# Altium PCB Oled.PcbDoc
Units mm, origin at the board's own origin, x right, y up, seen from the top; angles counter-clockwise.
Board outline 90 x 40 mm, 2 copper layers (Top Layer, Bottom Layer); 55 components, 35 nets, 161 pads, 42 vias.
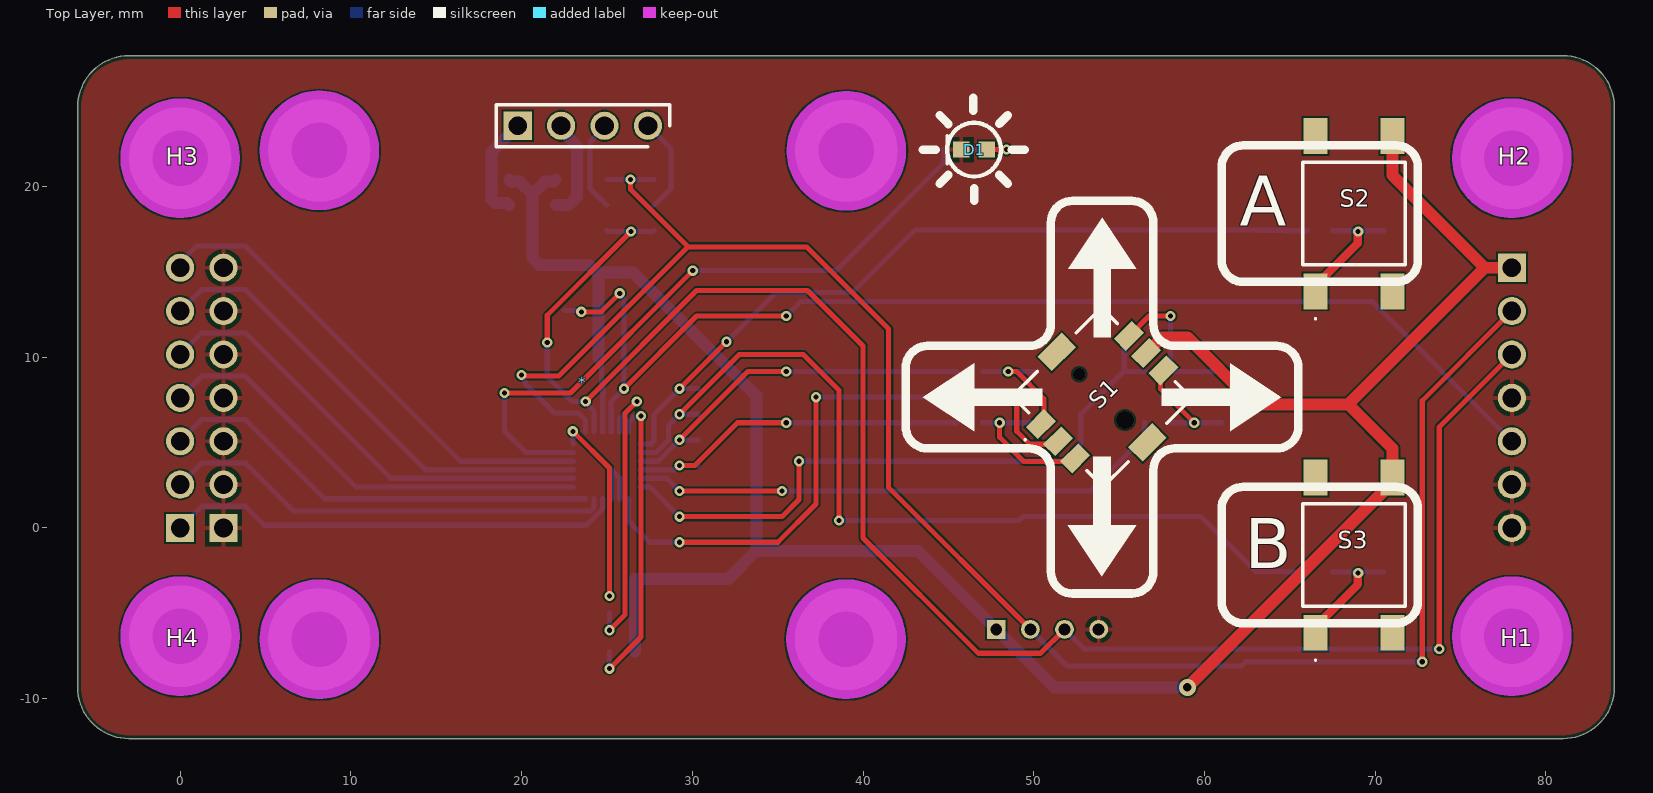
[diagram p0: Top Layer view]
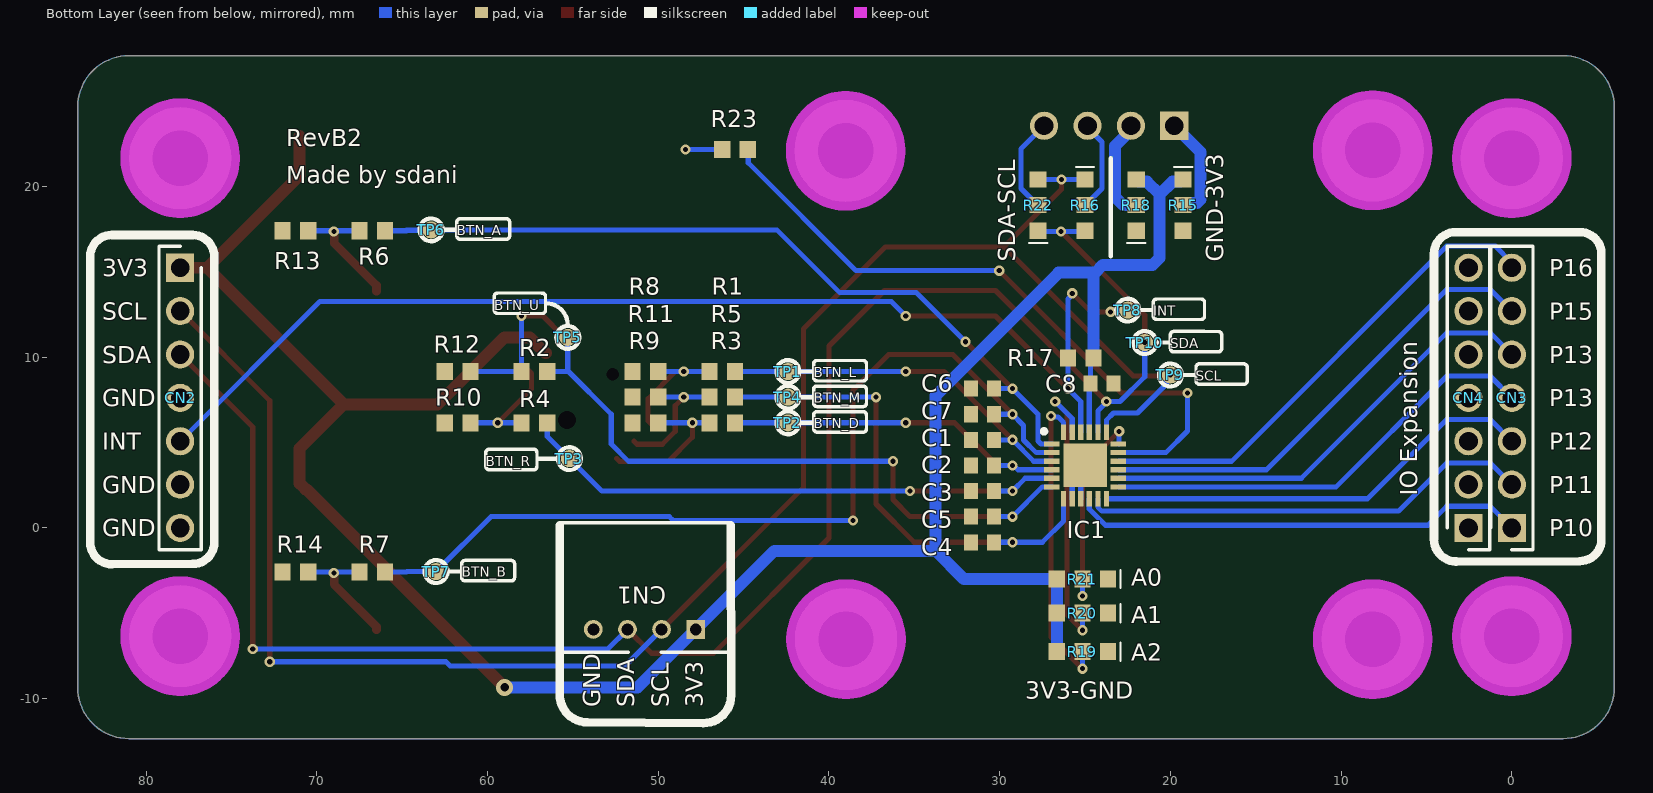
[diagram p1: Bottom Layer view, seen from below]
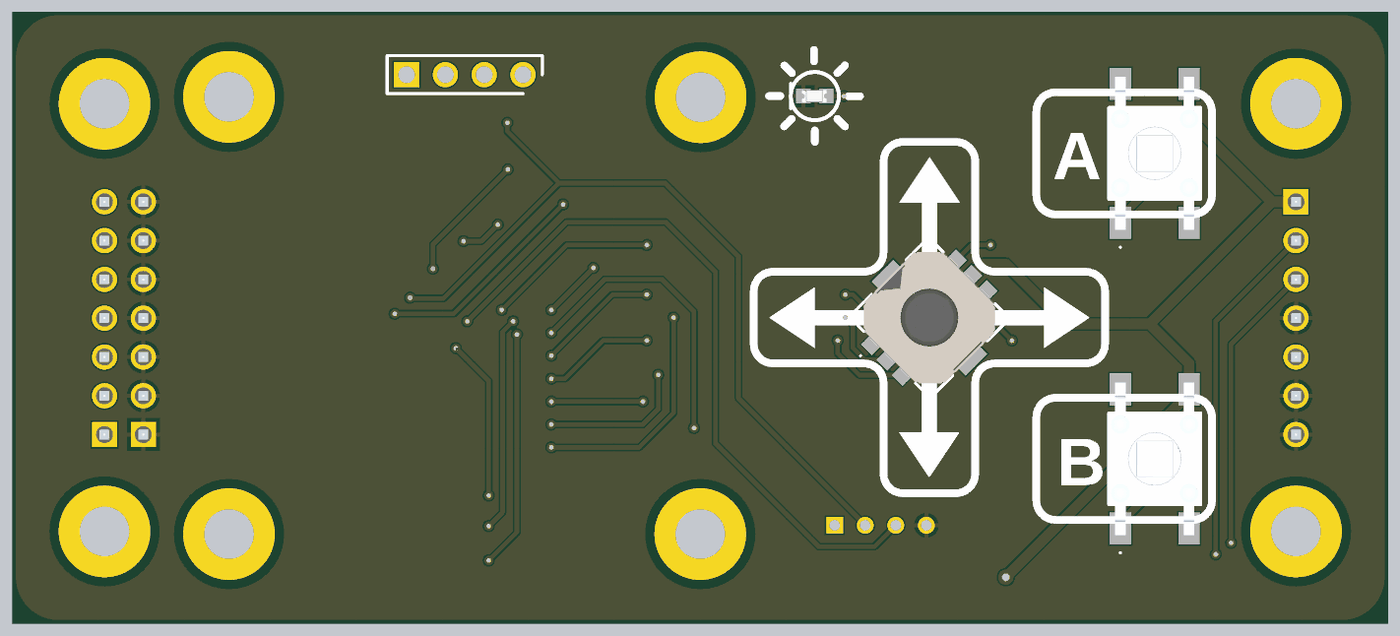
[diagram p2: 3D render of the assembled board from above, using the file's embedded part models]
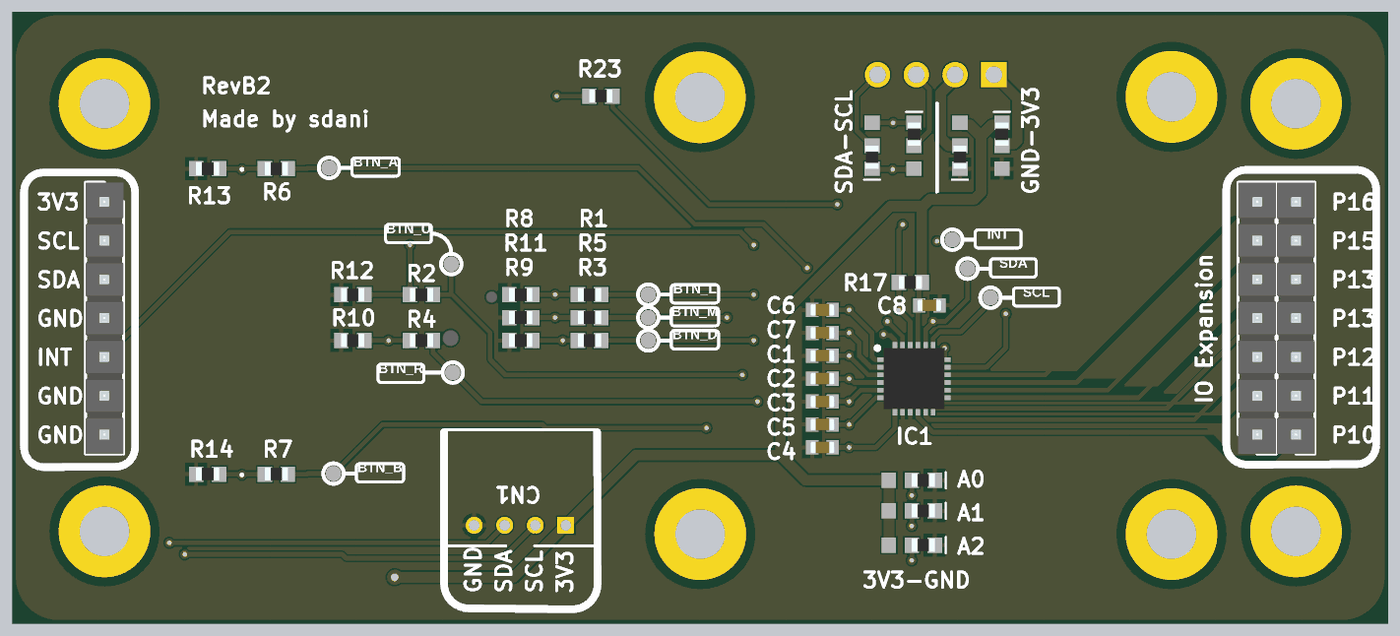
[diagram p3: 3D render of the assembled board from below, using the file's embedded part models]

## Layer stack, top to bottom
Top Solder: solder mask 0.0102, Solder Resist, Dk 3.5
Top Layer: signal copper 0.0356
Dielectric 1: dielectric 0.32, FR-4, Dk 4.8
Bottom Layer: signal copper 0.0356
Bottom Solder: solder mask 0.0102, Solder Resist, Dk 3.5

## Board outline
-3,-12.34 cw(c-3,-9.34) -6,-9.34 -6,24.66 cw(c-3,24.66) -3,27.66 81,27.66 cw(c81,24.66) 84,24.66 84,-9.34 cw(c81,-9.34) 81,-12.34

## Design rules (kind name [scope] priority, off if disabled: settings)
AcuteAngle [All] p1: minimum=4.50000000000000E+0001 checktracksonly=FALSE
BoardOutlineClearance [All] p1: gap=0.2 ignorepadtopadclearanceinfootprint=FALSE except(0: Arc-SplitContinuation Track-SplitContinuation SMDPad-SplitContinuation THPad-SplitContinuation Via-SplitContinuation Fill-SplitContinuation Poly-SplitContinuation Region-SplitContinuation Text-SplitContinuation)
Clearance [All] p1: gap=0.1 ignorepadtopadclearanceinfootprint=TRUE except(0: SMDPad-Hole THPad-Hole Via-Hole Text-Hole; 0.127: Arc-Arc Arc-Track Arc-SMDPad Track-Track Track-SMDPad SMDPad-SMDPad SMDPad-Via; 0.15: Arc-Via Track-Via THPad-Via; 0.2: Arc-THPad Arc-Hole Track-THPad Track-Hole SMDPad-THPad; 0.254: Via-Via)
ComponentClearance [All] p1: gap=0 collisioncheckmode=3 verticalgap=0 showdistances=FALSE
DiffPairsRouting 0,1 [All] p1: maxlimit=0.127 minlimit=0.127 mostfreqgap=0.127 toplayer_minwidth=0.123 toplayer_maxwidth=0.123 toplayer_prefwidth=0.123 bottomlayer_minwidth=0.123 bottomlayer_maxwidth=0.123 bottomlayer_prefwidth=0.123 maxuncoupledlength=12.7
HoleSize [All] p1: absolutevalues=TRUE maxlimit=6.3 minlimit=0.3 maxpercent=80.000 minpercent=20.000
HoleToHoleClearance [All] p1: gap=0.5 allowstackedmicrovias=TRUE
MinimumAnnularRing [All] p1: minimumring=0.05
MinimumSolderMaskSliver [All] p1: minsoldermaskwidth=0.1
PlaneConnect [All] p1: planeconnectstyle=Direct reliefexpansion=0.508 reliefentries=4 reliefconductorwidth=0.254 reliefairgap=0.254
PolygonConnect [All] p1: thpad.connectstyle=Relief thpad.reliefconductorwidth=0.254 thpad.reliefentries=4 thpad.polygonreliefangle="90 Angle" thpad.airgapwidth=0.254 smdpad.connectstyle=Relief smdpad.reliefconductorwidth=0.254 smdpad.reliefentries=4 smdpad.polygonreliefangle="90 Angle" smdpad.airgapwidth=0.254 via.connectstyle=Direct via.reliefconductorwidth=0.254 via.reliefentries=4 via.polygonreliefangle="90 Angle" via.airgapwidth=0.254
RoutingVias [All] p1: holewidth=0.15 width=0.25 viastyle="Through Hole" minholewidth=0.1 minwidth=0.2 maxholewidth=6.3 maxwidth=6.4
SilkToSilkClearance [All] p1: silktosilkclearance=0.1
SilkToSolderMaskClearance [IsPad] p1: minsilkscreentomaskgap=0.15 clearancetoexposedcopper=TRUE
SolderMaskExpansion SolderMaskExpansion_Via [IsVia] p1: expansion=0.102 istentingtop=TRUE
SolderMaskExpansion [All] p2: expansion=0 istentingtop=FALSE
SupplyNets "Schematic Supply Nets_1" [InNet('3V3')] p1: voltage=0.000
SupplyNets "Schematic Supply Nets" [InNet('GND')] p2: voltage=0.000
UnRoutedNet [All] p1: checkbadconnections=TRUE
ViasUnderSMD [All] p1: allowed=TRUE
Width [All] p1: maxlimit=6.3 minlimit=0.127 preferedwidth=0.5
21 further rules are at their usual default settings.

## Components (designator, comment, footprint, x,y, rotation, side; value= is the part's Value field where it differs from the comment)
* "SH1106_I2C" SH1106_I2C 16,9.66 r0 top locked
C1 "1uF" CAP0603 31,5.16 r180 bottom
C2 "1uF" CAP0603 31,3.66 r180 bottom
C3 "1uF" CAP0603 31,2.16 r180 bottom
C4 "1uF" CAP0603 31,-0.84 r180 bottom locked
C5 "1uF" CAP0603 31,0.66 r180 bottom
C6 "1uF" CAP0603 31,8.16 r180 bottom
C7 "1uF" CAP0603 31,6.66 r180 bottom
C8 "1uF" CAP0603 24,8.46 r0 bottom
CN1 "JST-PH" JST-PH-1x4-THT-RIGHT 47.8,-5.94 r0 bottom
CN2 "Pins 1x7" PIN-1X7 78,15.24 r90 bottom
CN3 "Pins 1x7" PIN-1X7 0,0 r270 bottom
CN4 "Pins 1x7" PIN-1X7 2.54,0 r270 bottom
D1 "LED" LED0603 46.5,22.16 r180 top
H1 "Mounting_Hole_0" MOUNTING_HOLE_M3_0 78,-6.34 r0 top locked
H2 "Mounting_Hole_0" MOUNTING_HOLE_M3_0 78,21.66 r0 top locked
H3 "Mounting_Hole_0" MOUNTING_HOLE_M3_0 0,21.66 r0 top locked
H4 "Mounting_Hole_0" MOUNTING_HOLE_M3_0 0,-6.34 r0 top locked
IC1 "TCA9555RTWR" WQFN-24 25,3.66 r180 bottom
R1 "100R" RES0603 46.25,9.16 r0 bottom
R2 "100R" RES0603 57.25,9.16 r180 bottom
R3 "100R" RES0603 46.25,6.16 r0 bottom
R4 "100R" RES0603 57.25,6.16 r0 bottom
R5 "100R" RES0603 46.25,7.66 r180 bottom
R6 "100R" RES0603 66.75,17.41 r180 bottom
R7 "100R" RES0603 66.75,-2.59 r180 bottom
R8 "10K" RES0603 50.75,9.16 r180 bottom
R9 "10K" RES0603 50.75,6.16 r180 bottom
R10 "10K" RES0603 61.75,6.16 r180 bottom
R11 "10K" RES0603 50.75,7.66 r180 bottom
R12 "10K" RES0603 61.75,9.16 r180 bottom
R13 "10K" RES0603 71.25,17.41 r180 bottom
R14 "10K" RES0603 71.25,-2.59 r180 bottom
R15 "0R" RES0603_SELECTION 19.25,19.66 r270 bottom
R16 "0R" RES0603_SELECTION 25,19.66 r270 bottom
R17 "10K" RES0603 25.25,9.96 r180 bottom
R18 "0R" RES0603_SELECTION 22,18.16 r90 bottom
R19 "0R" RES0603_SELECTION 24.4,-7.24 r0 bottom
R20 "0R" RES0603_SELECTION 24.4,-4.99 r0 bottom
R21 "0R" RES0603_SELECTION 24.4,-2.99 r0 bottom
R22 "0R" RES0603_SELECTION 27.75,18.16 r90 bottom
R23 "10K" RES0603 45.5,22.16 r180 bottom
S1 "MU-BUE70R" MUBUE70R 54,7.66 r45 top locked
S2 "Tactile switch" TS046673BK100SMT 68.75,18.41 r90 top
S3 "Tactile switch" TS046673BK100SMT 68.75,-1.59 r90 top
TP1 "Test Point" TP_PAD 42.4,9.16 r90 bottom
TP2 "Test Point" TP_PAD 42.4,6.16 r180 bottom
TP3 "Test Point" TP_PAD 55.2,4.06 r180 bottom
TP4 "Test Point" TP_PAD 42.4,7.66 r180 bottom
TP5 "Test Point" TP_PAD 55.3,11.16 r180 bottom
TP6 "Test Point" TP_PAD 63.3,17.46 r180 bottom
TP7 "Test Point" TP_PAD 63.013,-2.552 r180 bottom
TP8 "Test Point" TP_PAD 22.5,12.76 r180 bottom
TP9 "Test Point" TP_PAD 20,8.96 r180 bottom
TP10 "Test Point" TP_PAD 21.5,10.86 r90 bottom

## Footprints (in the part's own frame and the unit in brackets; to place one, negate y for a bottom-side part, rotate by r counter-clockwise, add the part's x,y. Pads: shape width x height; smd on the part's side, far side on the other; paste and mask are expansions set on the pad)
CAP0603 [mm] "1.6 x 0.8 x 0.8 mm"
  rect 0.81x0.94 smd: 1(-0.67,0) 2(0.67,0)
  body extent -0.8,-0.4 0.8,0.4, height 0.9
JST-PH-1x4-THT-RIGHT [mm]
  rect 1.1x1.1 hole 0.7: 1(0,0)
  round 1.1 hole 0.7: 2(2,0) 3(4,0) 4(6,0)
  silkscreen extent -1.95,-6.25 7.95,1.35
LED0603 [mm] "LEDC1608X80N"
  rect 0.95x0.95 smd: A(-0.75,0) C(0.75,0)
  silkscreen extent 1.58,-0.82 1.58,0.82, body extent -0.77,-0.4 0.83,0.4, height 0.7
MOUNTING_HOLE_M3_0 [mm] "Mounting hole for M3 screws."
  round 6 hole 3.25: H?(0,0)
  Keep-Out Layer circle w3.5: c0,0 r1.75
MUBUE70R [mm]
  rect 1.5x1 smd: A(-3.65,1.425) B(-3.65,0) C(-3.65,-1.425) D(3.65,-1.425) E(3.65,0) F(3.65,1.425)
  round 0.375 hole 0.75 unplated: MH1(0,1.9)
  round 0.525 hole 1.05 unplated: MH2(0,-1.9)
  rect 2x1.2 smd: MP1(0,3.75) MP2(0,-3.75)
  silkscreen extent -5,-3.75 3.67,3.75, body extent -3.75,-3.75 3.75,3.75, height 7.01
PIN-1X7 [mm]
  rect 1.65x1.65 hole 1.1: 1(0,0)
  round 1.65 hole 1.1: 2(-2.54,0) 3(-5.08,0) 4(-7.62,0) 5(-10.16,0) 6(-12.7,0) 7(-15.24,0)
  silkscreen extent -16.51,-1.24 1.27,1.24, body extent -16.51,-1.24 1.27,1.24, height 8.38
RES0603 [mm] "Resistor 0603 (1608 metric)"
  rect 0.95x1 smd: 1(-0.75,0) 2(0.75,0)
  body extent -0.76,-0.43 0.76,0.43, height 0.45
RES0603_SELECTION [mm] "Resistor 0603 (1608 metric)"
  rect 0.95x1 smd: 1(-0.75,0) 2(0.75,0) 3(2.25,0)
  silkscreen extent -1.47,-0.53 -1.47,0.53, body extent -0.76,-0.43 0.76,0.43, height 0.45
SH1106_I2C [mm]
  rect 1.65x1.65 hole 1.1: 1(3.775,13.9)
  round 1.65 hole 1.1: 2(6.315,13.9) 3(8.855,13.9) 4(11.395,13.9)
  round 6 hole 3.25: H?(-7.85,-16.175) H?(-7.85,12.45) H?(23,-16.175) H?(23.025,12.425)
  Keep-Out Layer circle w3.5: c23,-16.175 r1.75
  Keep-Out Layer circle w3.5: c-7.85,-16.175 r1.75
  Keep-Out Layer circle w3.5: c23.025,12.425 r1.75
  Keep-Out Layer circle w3.5: c-7.85,12.45 r1.75
  silkscreen extent 2.5,12.66 12.66,15.14, body extent -10.42,-18.86 25.58,15.14, height 5.6
TP_PAD [mm]
  round 1 smd: 1(0,0)
TS046673BK100SMT [mm]
  rect 2.1x1.4 smd: 1(-4.55,2.25) 2(-4.55,-2.25) 3(4.55,2.25) 4(4.55,-2.25)
  silkscreen extent -6.2,-3 3,3, body extent -5,-3 5,3, height 7.3
WQFN-24 [mm]
  rect 0.9x0.3 smd: 1(-1.95,1.25) 2(-1.95,0.75) 3(-1.95,0.25) 4(-1.95,-0.25) 5(-1.95,-0.75) 6(-1.95,-1.25) 13(1.95,-1.25) 14(1.95,-0.75) 15(1.95,-0.25) 16(1.95,0.25) 17(1.95,0.75) 18(1.95,1.25)
  rect 0.3x0.9 smd: 7(-1.25,-1.95) 8(-0.75,-1.95) 9(-0.25,-1.95) 10(0.25,-1.95) 11(0.75,-1.95) 12(1.25,-1.95) 19(1.25,1.95) 20(0.75,1.95) 21(0.25,1.95) 22(-0.25,1.95) 23(-0.75,1.95) 24(-1.25,1.95)
  rect 2.55x2.55 smd: 25(0,0)
  silkscreen extent -2.53,1.88 -2.28,2.12, body extent -2,-2 2,2, height 0.8

## Part data
C1 C2 C3 C4 C5 C6 C7 C8: "Capacitor", LCSC Part Number=C29936, Voltage=25V
CN1: library part JST-PH-1x4, "JST-PH-1x4 2mm", LCSC Part Number=C131334, Mouser Part Number=306-B03BPASKLFSN
CN2 CN3 CN4: library part Pin-1x7, "2.54mm", Package="SMD 1.27mm", CompType=M50-3530342, Distributor=Mouser, Order Code=855-M50-3530342, Part Class=Connector
D1: "Light Emitting Diode", LCSC Part Number=C965800, Vf=2.3V
H1 H2 H3 H4: "Mounting hole with no connectivity."
IC1: "Integrated Circuit", LCSC Part Number=C42420609, Manufacturer_Name="Texas Instruments", Mouser Part Number=595-TCA9555RTWR, Arrow Part Number=TCA9555RTWR, Arrow Price/Stock=https://www.arrow.com/en/products/tca9555rtwr/texas-instruments?region=nac, Datasheet Link=http://www.ti.com/lit/gpn/tca9555, Height=0.8mm, Manufacturer_Part_Number=TCA9555RTWR, Mouser Price/Stock=https://www.mouser.co.uk/ProductDetail/Texas-Instruments/TCA9555RTWR?qs=O3wcJz4o8IcrHWYYvhjJoA%3D%3D
R1 R2 R3 R4 R5 R6 R7: "Resistor", LCSC Part Number=C105588
R8 R9 R10 R11 R12 R13 R14 R17 R23: "Resistor", LCSC Part Number=C98220
R15 R16 R18 R19 R20 R21 R22: library part Resistor_Selection, "Resistor selection between 2 value.", LCSC Part Number=C2906974
S1: "Switch", LCSC Part Number=C2858287, Manufacturer_Name=Apem, Datasheet Link=https://www.mouser.se/datasheet/2/26/PCB_MU_serie-3371204.pdf, Height=7.2mm, Manufacturer_Part_Number=MU-BUE70R
S2 S3: "Switch (2-Pin Push) / Mouser and LCSC connection are different! Use only opposite corner pins.", LCSC Part Number=C49234152, Mouser Part Number=179-TS046673BK100SMT

## Via types
v1: diameter 0.6, hole 0.3, Top Layer to Bottom Layer, tented both sides, 41 vias
v2: diameter 1, hole 0.5, Top Layer to Bottom Layer, tented both sides, 1 vias

## Nets (pads, with @x,y where several pads share a name; then routed paths per layer and width w, separated by ;. In a path a pad name is that pad's centre, name@x,y a point inside that pad or via, vN(x,y) a via of type N, cw(c..) or ccw(c..) an arc to the next point about the centre after c; other vN are vias at no path point)
3V3: C8.2 CN1.1 CN2.1 IC1.21 R15.1 R17.2 R18.3 R19.3 R20.3 R21.3 S1.E S2.4 S3.4 | length 142.1
  Top Layer w0.7: S1.E 56.606,10.241 57.525,11.16 59,11.16 62.92,7.24 68.42,7.24 ; v2(59,-9.34) 70.6,2.26 70.65,2.26 71,2.61 S3.4 71,4.66 68.42,7.24 ; S2.4 71,20.66 76.42,15.24 ; CN2.1 76.42,15.24 ; 68.42,7.24 76.42,15.24
  Bottom Layer w0.3: R17.2 24.67,9.79 C8.2 24.75,8.38 IC1.21
  Bottom Layer w0.7: R15.1@19.275,20.41 19.4,20.285 19.875,20.285 20.625,19.535 ; R18.3 21.875,20.285 21.375,20.285 20.625,19.535 ; R17.2 24.5,14.951 ; R19.3 R20.3 R21.3 32.1,-2.99 33.75,-1.34 ; v2(59,-9.34) 51.2,-9.34 CN1.1 43.2,-1.34 33.75,-1.34 ; 20.625,19.535 20.625,15.82 21.035,15.41 23.95,15.41 24.409,14.951 24.5,14.951 ; 24.5,14.951 26.545,14.951 33.75,7.746 33.75,-1.34
BUTTON_A: C6.2 IC1.1 R6.2 TP6.1 | length 46.3
  Top Layer w0.3: v1(29.25,8.16) v1(32,10.91)
  Bottom Layer w0.3: IC1.1 27.574,4.91 27.75,5.086 27.75,6.66 v1(29.25,8.16) C6.2 ; v1(32,10.91) 34.872,13.782 39.372,13.782 43.05,17.46 TP6.1 63.325,17.435 64.725,17.435 64.75,17.41 R6.2
BUTTON_B: C7.2 IC1.2 R7.2 TP7.1 | length 53
  Top Layer w0.3: v1(29.25,6.66) 32.75,10.16 36.5,10.16 38.589,8.071 v1(38.589,0.433)
  Bottom Layer w0.3: IC1.2 27.85,4.41 28.596,5.156 28.596,6.006 v1(29.25,6.66) C7.2 ; v1(38.589,0.433) 49.122,0.433 49.348,0.66 59.8,0.66 TP7.1 64.712,-2.552 64.75,-2.59 R7.2
BUTTON_DOWN: C2.2 IC1.4 R3.1 TP2.1 | length 20.8
  Top Layer w0.3: v1(29.25,3.66) 30.146,3.66 32.646,6.16 v1(35.5,6.16)
  Bottom Layer w0.3: IC1.4 28.924,3.41 29.174,3.66 C2.2 ; v1(35.5,6.16) TP2.1 44.25,6.16 R3.1
BUTTON_LEFT: C1.2 IC1.3 R1.1 TP1.1 | length 21.8
  Top Layer w0.3: v1(29.25,5.16) 33.25,9.16 v1(35.5,9.16)
  Bottom Layer w0.3: IC1.3 28,3.91 v1(29.25,5.16) C1.2 ; v1(35.5,9.16) 44.25,9.16 R1.1
BUTTON_MIDDLE: C4.2 IC1.7 R5.2 TP4.1 | length 29.3
  Top Layer w0.3: v1(29.25,-0.84) 35,-0.84 37.25,1.41 v1(37.25,7.66)
  Bottom Layer w0.3: IC1.7 26.25,0.41 27.5,-0.84 v1(29.25,-0.84) C4.2 ; v1(37.25,7.66) R5.2
BUTTON_RIGHT: C3.2 IC1.5 R4.1 TP3.1 | length 33.1
  Top Layer w0.3: v1(29.25,2.16) v1(35.25,2.16)
  Bottom Layer w0.3: IC1.5 28.5,2.91 v1(29.25,2.16) C3.2 ; v1(35.25,2.16) 53.3,2.16 TP3.1 56.5,5.36 R4.1
BUTTON_UP: C5.2 IC1.6 R2.2 TP5.1 | length 39.2
  Top Layer w0.3: v1(29.25,0.66) 35.25,0.66 36.25,1.66 v1(36.25,3.91)
  Bottom Layer w0.3: IC1.6 27.5,2.41 v1(29.25,0.66) C5.2 ; v1(36.25,3.91) 51.75,3.91 52.75,4.91 52.75,6.66 55.25,9.16 ; TP5.1 55.3,9.21 55.25,9.16 ; R2.2 55.25,9.16
GND: C1.1 C2.1 C3.1 C4.1 C5.1 C6.1 C7.1 C8.1 CN1.4 CN2.4 CN2.6 CN2.7 CN4.1 CN4.2 CN4.3 CN4.4 CN4.5 CN4.6 CN4.7 D1.C IC1.8 IC1.9 IC1.25 R8.1 R9.1 R10.1 R11.1 R12.1 R13.1 R14.1 R15.3 R18.1 R19.1 R20.1 R21.1 | length 4.3
  Bottom Layer w0.3: IC1.9 25.25,3.41 IC1.25 25.75,2.91 IC1.8
INT: CN2.5 IC1.22 R17.1 TP8.1 | length 69.8
  Top Layer w0.3: v1(23.5,12.66) 24.661,12.66 v1(25.745,13.744) ; v1(26,8.16) 30.25,12.41 v1(35.5,12.41)
  Bottom Layer w0.3: TP8.1 22.528,12.732 23.347,12.732 23.419,12.66 v1(23.5,12.66) ; IC1.22 25.25,7.41 v1(26,8.16) R17.1 26,13.408 25.745,13.663 v1(25.745,13.744) ; v1(35.5,12.41) 36.35,13.26 69.82,13.26 CN2.5
Net*_1: *.1 R15.2 | length 6.1
  Bottom Layer w0.7: R15.2 19.125,19.035 18.451,19.035 18.246,19.24 18.246,22.031 *.1
Net*_2: *.2 R18.2 | length 6
  Bottom Layer w0.7: R18.2 22.75,18.91 23.25,19.41 23.25,22.368 22.315,23.303 *.2
Net*_3: *.3 R16.2 | length 5.4
  Bottom Layer w0.3: *.3 24.855,23.467 24,22.612 24,19.885 24.975,18.91 R16.2
Net*_4: *.4 R22.2 | length 5.6
  Bottom Layer w0.3: *.4 28.75,22.205 28.75,19.885 27.775,18.91 R22.2
NetD1_A: D1.A R23.1 | length 3.3
  Top Layer w0.3: D1.A v1(48.4,22.16)
  Bottom Layer w0.3: R23.1 v1(48.4,22.16)
NetIC1_17: IC1.17 R23.2 | length 38.9
  Top Layer w0.3: v1(19,7.91) 22.863,7.91 v1(30.023,15.071)
  Bottom Layer w0.3: v1(19,7.91) 19,5.682 20.272,4.41 IC1.17 ; v1(30.023,15.071) 38.411,15.071 44.726,21.386 44.726,22.136 R23.2
NetIC1_18: IC1.18 R21.2 | length 12.3
  Top Layer w0.3: v1(23,5.66) 25.15,3.51 v1(25.15,-3.99)
  Bottom Layer w0.3: v1(23,5.66) 23,4.91 IC1.18 ; v1(25.15,-3.99) R21.2
NetIC1_23: IC1.23 R20.2 | length 17.3
  Top Layer w0.3: v1(25.15,-5.99) 26.056,-5.084 26.056,6.716 v1(26.75,7.41)
  Bottom Layer w0.3: v1(25.15,-5.99) R20.2 ; IC1.23 25.75,6.41 v1(26.75,7.41)
NetIC1_24: IC1.24 R19.2 | length 18
  Top Layer w0.3: v1(25.15,-8.24) 27,-6.39 v1(27,6.556)
  Bottom Layer w0.3: v1(25.15,-8.24) R19.2 ; IC1.24 26.25,6.177 26.572,6.499 26.943,6.499 v1(27,6.556)
NetR1_2: R1.2 R8.2 S1.A | length 7.3
  Top Layer w0.3: v1(48.5,9.16) 49,9.16 50.588,7.572 50.588,6.263 S1.A
  Bottom Layer w0.3: R1.2 v1(48.5,9.16) R8.2
NetR2_1: R2.1 R12.2 S1.F | length 9.2
  Top Layer w0.3: S1.F 55.589,11.249 56.75,12.41 v1(58,12.41)
  Bottom Layer w0.3: v1(58,12.41) R2.1 R12.2
NetR3_2: R3.2 R9.2 S1.C | length 8.9
  Top Layer w0.3: v1(48,6.16) 48,5.311 49.417,3.895 52.25,3.895 S1.C
  Bottom Layer w0.3: R3.2 R9.2
NetR4_2: R4.2 R10.2 S1.D | length 7
  Top Layer w0.3: S1.D 57.412,9.057 57.412,8.148 v1(59.4,6.16)
  Bottom Layer w0.3: R4.2 v1(59.4,6.16) R10.2
NetR5_1: R5.1 R11.2 S1.B | length 8
  Top Layer w0.3: v1(48.5,7.66) 49,7.16 49,5.66 49.758,4.902 51.242,4.902 S1.B
  Bottom Layer w0.3: R5.1 v1(48.5,7.66) R11.2
NetR6_1: R6.1 R13.2 S2.1 | length 7.5
  Top Layer w0.5: S2.1 66.5,14.21 68.981,16.691 68.981,17.341 v1(69,17.36)
  Bottom Layer w0.3: R6.1 R13.2
NetR7_1: R7.1 R14.2 S3.1 | length 7.4
  Top Layer w0.5: S3.1@66.5,-5.965 66.5,-5.79 68.981,-3.309 68.981,-2.659 v1(69,-2.64)
  Bottom Layer w0.3: R7.1 R14.2
P10: CN3.1 IC1.10 | length 26.7
  Bottom Layer w0.3: CN3.1 1.27,1.27 3.81,1.27 4.92,0.16 23.796,0.16 24.75,1.114 IC1.10
P11: CN3.2 IC1.11 | length 26.5
  Bottom Layer w0.3: CN3.2 1.27,3.81 3.81,3.81 6.637,0.983 24.015,0.983 24.25,1.218 IC1.11
P12: CN3.3 IC1.12 | length 26.2
  Bottom Layer w0.3: CN3.3 1.27,6.35 3.81,6.35 8.45,1.71 IC1.12
P13: CN3.4 IC1.13 | length 26.3
  Bottom Layer w0.3: CN3.4 1.28,8.9 3.8,8.9 10.29,2.41 IC1.13
P14: CN3.5 IC1.14 | length 27.1
  Bottom Layer w0.3: CN3.5 1.27,11.43 3.81,11.43 12.33,2.91 IC1.14
P15: CN3.6 IC1.15 | length 28
  Bottom Layer w0.3: CN3.6 1.27,13.97 3.81,13.97 14.37,3.41 IC1.15
P16: CN3.7 IC1.16 | length 29
  Bottom Layer w0.3: CN3.7 0,15.535 0.975,16.51 3.81,16.51 16.41,3.91 IC1.16
SCL: CN1.2 CN2.2 IC1.19 R16.1 R22.3 TP9.1 | length 108.1
  Top Layer w0.3: v1@20,8.91 22.194,8.91 29.75,16.466 ; v1(26.375,20.41) 26.375,19.841 29.75,16.466 ; CN1.2 41.5,2.36 41.5,11.66 36.694,16.466 29.75,16.466 ; v1(72.75,-7.84) 72.75,7.45 CN2.2
  Bottom Layer w0.3: v1(20,8.96) 20,8.91 20,8.771 20.222,8.549 20.222,8.438 21.93,6.73 23.33,6.73 23.75,6.31 IC1.19 ; R16.1 v1(26.375,20.41) R22.3 ; CN1.2 51.95,-8.09 62.184,-8.09 62.434,-7.84 v1(72.75,-7.84)
SDA: CN1.3 CN2.3 IC1.20 R16.3 R22.1 TP10.1 | length 106.3
  Top Layer w0.3: v1@21.5,10.91 21.5,12.46 v1(26.4,17.36) ; v1(23.75,7.41) 30.25,13.91 36.75,13.91 40,10.66 40,-0.59 46.75,-7.34 50.4,-7.34 CN1.3 ; v1(73.75,-7.09) 73.75,5.91 CN2.3
  Bottom Layer w0.3: TP10.1@21.5,10.886 v1(21.5,10.86) 21.5,8.86 22.95,7.41 v1(23.75,7.41) 23.75,7.349 24.25,6.849 IC1.20 ; R16.3 25.05,17.36 27.7,17.36 R22.1 ; CN1.3 52.95,-7.09 v1(73.75,-7.09)
pads on no net: *.H? H1.H? H2.H? H3.H? H4.H? S1.MH1 S1.MH2 S1.MP1 S1.MP2 S2.2 S2.3 S3.2 S3.3

## Polygon pours and split planes (outlines as drawn)
GND on Top Layer "GND_L01_P001" (solid, pour order 1): -3.13,-12.493 cw(c-3.13,-9.493) -6.13,-9.493 -6.13,24.507 cw(c-3.13,24.507) -3.13,27.507 80.87,27.507 cw(c80.87,24.507) 83.87,24.507 83.87,-9.493 cw(c80.87,-9.493) 80.87,-12.493
GND on Bottom Layer "NONET_L02_P000" (solid, shelved, pour order 0): -3,-12.34 cw(c-3,-9.34) -6,-9.34 -6,24.66 cw(c-3,24.66) -3,27.66 81,27.66 cw(c81,24.66) 84,24.66 84,-9.34 cw(c81,-9.34) 81,-12.34

## Silkscreen, mask and mechanical layers (free items; w line width, h text height)
Top Overlay:
  circle w0.254: c46.5,22.16 r1.575
  region: 53.493,4.171 53.493,0.171 51.993,0.171 53.993,-2.829 55.993,0.171 54.493,0.171 54.493,4.171
  region: 54.513,11.171 54.513,15.171 56.013,15.171 54.013,18.171 52.013,15.171 53.513,15.171 53.513,11.171
  region: 57.5,7.16 61.5,7.16 61.5,5.66 64.5,7.66 61.5,9.66 61.5,8.16 57.5,8.16
  region: 50.5,8.16 46.5,8.16 46.5,9.66 43.5,7.66 46.5,5.66 46.5,7.16 50.5,7.16
  lines w0.5: 43.5,22.16 44.25,22.16 ; 44.486,20.174 44.986,20.674 ; 44.5,24.16 45,23.66 ; 46.445,24.434 46.445,25.184 ; 46.5,19.16 46.5,19.91 ; 47.972,23.674 48.472,24.174 ; 47.979,20.674 48.479,20.174 ; 48.707,22.142 49.457,22.142 ; 42.5,5.93 ccw(c43.77,5.93) 43.77,4.66 49.73,4.66 cw(c49.73,3.39) 51,3.39 51,-2.57 ccw(c52.27,-2.57) 52.27,-3.84 55.73,-3.84 ccw(c55.73,-2.57) 57,-2.57 57,3.39 cw(c58.27,3.39) 58.27,4.66 64.23,4.66 ccw(c64.23,5.93) 65.5,5.93 65.5,9.39 ccw(c64.23,9.39) 64.23,10.66 58.27,10.66 cw(c58.27,11.93) 57,11.93 57,17.89 ccw(c55.73,17.89) 55.73,19.16 52.27,19.16 ccw(c52.27,17.89) 51,17.89 51,11.93 cw(c49.73,11.93) 49.73,10.66 46.5,10.66 43.77,10.66 ccw(c43.77,9.39) 42.5,9.39 42.5,5.93 ; 61,-4.32 ccw(c62.27,-4.32) 62.27,-5.59 71.23,-5.59 ccw(c71.23,-4.32) 72.5,-4.32 72.5,1.14 ccw(c71.23,1.14) 71.23,2.41 68,2.41 62.27,2.41 ccw(c62.27,1.14) 61,1.14 61,-4.32 ; 61,15.68 ccw(c62.27,15.68) 62.27,14.41 71.23,14.41 ccw(c71.23,15.68) 72.5,15.68 72.5,21.14 ccw(c71.23,21.14) 71.23,22.41 68,22.41 62.27,22.41 ccw(c62.27,21.14) 61,21.14 61,15.68
  text "A" at 62.071,16.734 h5
  text "B" at 62.356,-3.313 h5
Bottom Overlay:
  drawing of 154 lines, arcs and shapes, not listed
  text "RevB2" at 71.8,22.36 h1
  text "Made by sdani" at 71.8,20.193 h1
  text "BTN_A" at 61.8,16.935 h1
  text "GND-3V3" at 16.9,15.6 h1 r270
  text "SDA-SCL" at 29.1,15.6 h1 r270
  text "P16" at -2.2,14.74 h1
  text "3V3" at 82.55,14.74 h1
  text "BTN_U" at 59.6,12.56 h1
  text "P15" at -2.2,12.2 h1
  text "INT" at 21,12.21 h1
  text "SCL" at 82.55,12.2 h1
  text "SDA" at 20,10.31 h1
  text "P13" at -2.2,9.66 h1
  text "SDA" at 82.55,9.66 h1
  text "BTN_L" at 40.9,8.635 h1
  text "SCL" at 18.5,8.41 h1
  text "P13" at -2.2,7.12 h1
  text "BTN_M" at 40.9,7.135 h1
  text "GND" at 82.55,7.12 h1
  text "BTN_D" at 40.9,5.635 h1
  text "P12" at -2.2,4.58 h1
  text "INT" at 82.55,4.58 h1
  text "BTN_R" at 60.1,3.41 h1
  text "P11" at -2.2,2.04 h1
  text "GND" at 82.55,2.04 h1
  text "IO Expansion" at 5.533,1.9 h1 r270
  text "P10" at -2.2,-0.5 h1
  text "GND" at 82.55,-0.5 h1
  text "BTN_B" at 61.513,-3.077 h1
  text "A0" at 22.3,-3.39 h1
  text "A1" at 22.3,-5.59 h1
  text "A2" at 22.3,-7.79 h1
  text "3V3-GND" at 28.5,-10 h1
  text "3V3" at 47.39,-10.49 h1 r270
  text "SCL" at 49.39,-10.49 h1 r270
  text "SDA" at 51.39,-10.49 h1 r270
  text "GND" at 53.39,-10.49 h1 r270
Mechanical 1:
  the board outline again, w0.254